# Altium PCB 6678_double_vpx.PcbDoc (part 3 of 3)
Units mil, origin at the board's own origin, x right, y up, seen from the top; angles counter-clockwise.
Board outline 6299.21 x 3937.01 mil, 6 copper layers (TOP, GND02, S03, S04, GND05, BOTTOM), stack 32.112 mil thick; 42 components, 156 nets, 734 pads, 1033 vias.
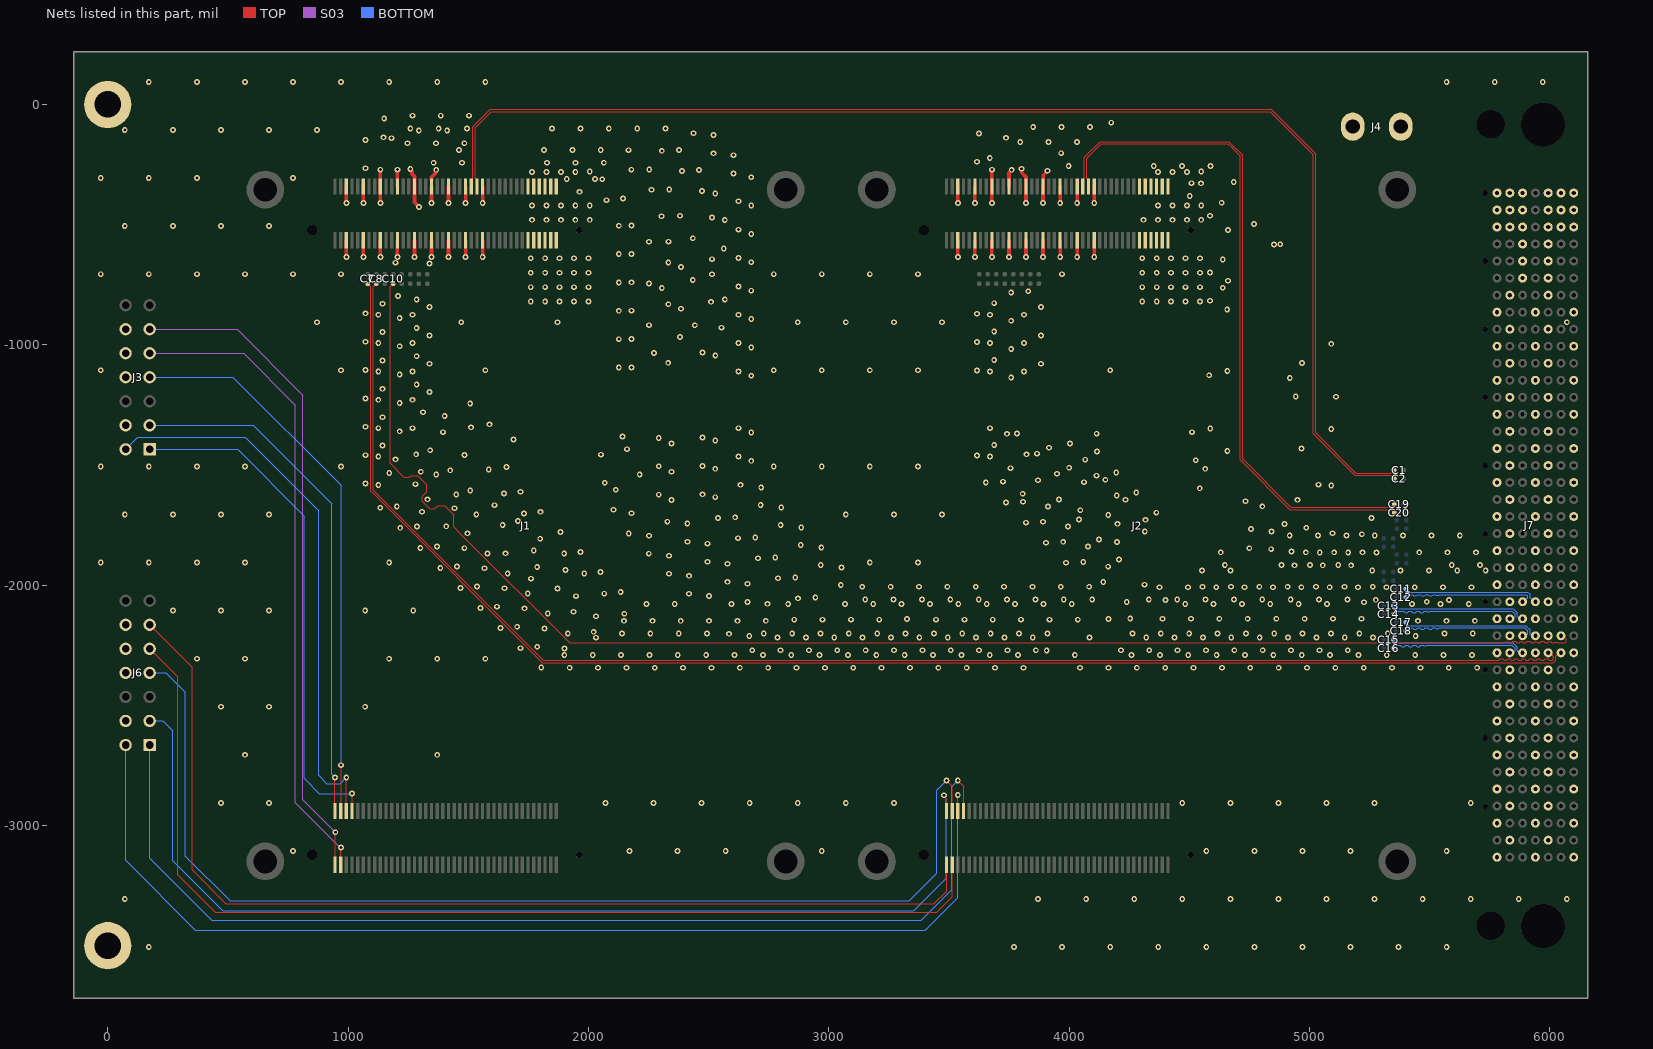
[diagram p7: the nets of this part, all layers, seen from the top]

## Via types
v1: diameter 24, hole 12, TOP to BOTTOM, tented both sides, 833 vias
v2: diameter 24, hole 12, TOP to BOTTOM, 200 vias

## Nets (pads, with @x,y where several pads share a name; then routed paths per layer and width w, separated by ;. In a path a pad name is that pad's centre, name@x,y a point inside that pad or via, vN(x,y) a via of type N, cw(c..) or ccw(c..) an arc to the next point about the centre after c; other vN are vias at no path point) (continued)
F4_BANK110_RX2_P: C10.1 J7.P2_B3 | length 6136.9
  TOP w4: C10.1@1187.91,-745.69 1175.19,-758.4 1175.19,-1493.05 1230.07,-1547.93 1233.56,-1551.41 1254.49,-1551.41 1260.83,-1545.07 1290.05,-1545.07 1327.3,-1582.32 1327.3,-1611.54 1308.42,-1630.42 1308.42,-1651.35 1339.81,-1682.75 1360.74,-1682.75 1373.28,-1670.21 1402.5,-1670.21 1439.75,-1707.46 1439.75,-1736.68 1439.75,-1757.61 1469.49,-1787.35 1922.14,-2240 5809,-2240 5811,-2240 5815.93,-2235.07 5825.93,-2235.07 5830.85,-2240 5840.85,-2240 5846.85,-2234 5856.85,-2234 5862.85,-2240 5872.85,-2240 5876.52,-2236.33 5886.52,-2236.33 5890.2,-2240 5900.2,-2240 5906.2,-2234 5916.2,-2234 5922.2,-2240 5932.2,-2240 5935.87,-2236.33 5945.87,-2236.33 5949.54,-2240 5959.54,-2240 5965.54,-2234 5975.54,-2234 5981.54,-2240 5991.54,-2240 5995.28,-2236.25 6005.28,-2236.25 6009.03,-2240 6019.03,-2240 6021.52,-2237.52 6031.52,-2237.52 6034,-2240 6036,-2240 6063.03,-2240 6068.03,-2235 6068.03,-2225 6053.66,-2210.63 J7.P2_B3@6046.46,-2210.63
F4_BANK110_RX3_N: C7.1 J7.P2_B4 | length 6142.3
  TOP w4: C7.1@1081.61,-745.69 1094.32,-758.4 1094.32,-1608.32 1100.18,-1614.18 1802.21,-2316.21 1808.07,-2322.07 6014.61,-2322.07 6024.88,-2311.8 6024.88,-2295 6038.39,-2281.5 J7.P2_B4@6046.46,-2281.5
F4_BANK110_RX3_P: C8.1 J7.P2_C4 | length 6142.1
  TOP w4: C8.1@1117.04,-745.69 1104.32,-758.4 1104.32,-1604.18 1812.21,-2312.07 5783,-2312.07 5787.54,-2312.07 5793.54,-2306.07 5803.54,-2306.07 5809.54,-2312.07 5819.54,-2312.07 5824.41,-2307.2 5834.41,-2307.2 5839.29,-2312.07 5849.29,-2312.07 5855.29,-2306.07 5865.29,-2306.07 5871.29,-2312.07 5881.29,-2312.07 5886.16,-2307.2 5896.16,-2307.2 5901.04,-2312.07 5911.04,-2312.07 5917.04,-2306.07 5927.04,-2306.07 5933.04,-2312.07 5943.04,-2312.07 5949.04,-2306.07 5959.04,-2306.07 5965.04,-2312.07 5975.04,-2312.07 5981.02,-2306.09 5991.02,-2306.09 5997,-2312.07 5999,-2312.07 6010.47,-2312.07 6014.88,-2307.66 6014.88,-2295 6001.38,-2281.5 J7.P2_C4@5993.31,-2281.5
F4_BANK110_TX0_N: C12.1 J7.P2_E1 | length 572.1
  BOTTOM w4: C12.1@5400.68,-2051 5412.76,-2038.92 5427,-2038.92 5429,-2038.92 5435,-2044.92 5445,-2044.92 5451,-2038.92 5461,-2038.92 5467,-2044.92 5477,-2044.92 5483,-2038.92 5493,-2038.92 5499,-2044.92 5509,-2044.92 5515,-2038.92 5525,-2038.92 5527.64,-2041.56 5537.64,-2041.56 5540.27,-2038.92 5555,-2038.92 5802,-2038.92 5895,-2038.92 5904.92,-2038.92 5908.58,-2042.58 5908.58,-2052.23 5896.05,-2064.77 5896.05,-2068.9 J7.P2_E1@5887.01,-2068.9
F4_BANK110_TX0_P: C11.1 J7.P2_D1 | length 572.1
  BOTTOM w4: C11.1@5400.68,-2015.57 5414.04,-2028.92 5909.06,-2028.92 5918.58,-2038.44 5918.58,-2052.23 5931.12,-2064.77 5931.12,-2068.9 J7.P2_D1@5940.16,-2068.9
F4_BANK110_TX1_N: C14.1 J7.P2_F2 | length 570.2
  BOTTOM w4: C14.1@5348.69,-2120.98 5361.4,-2108.27 5369.85,-2108.27 5370.12,-2108 5390,-2108 5392,-2108 5398,-2114 5408,-2114 5414,-2108 5424,-2108 5430,-2114 5440,-2114 5446,-2108 5456,-2108 5462,-2114 5472,-2114 5478,-2108 5488,-2108 5490,-2110 5500,-2110 5502,-2108 5527,-2108 5706,-2108 5844,-2108 5848,-2112 5855.43,-2119.43 5855.43,-2131 5853.06,-2133.37 5840.25,-2133.37 J7.P2_F2@5833.86,-2139.76
F4_BANK110_TX1_P: C13.1 J7.P2_E2 | length 570.2
  BOTTOM w4: C13.1@5348.69,-2085.55 5361.4,-2098.27 5365.71,-2098.27 5365.98,-2098 5848.14,-2098 5865.43,-2115.29 5865.43,-2131 5867.81,-2133.37 5880.62,-2133.37 J7.P2_E2@5887.01,-2139.76
F4_BANK110_TX2_N: C18.1 J7.P2_E3 | length 572.1
  BOTTOM w4: C18.1@5400.68,-2190 5412.69,-2178 5426,-2178 5428,-2178 5434,-2184 5444,-2184 5450,-2178 5460,-2178 5466,-2184 5476,-2184 5482,-2178 5492,-2178 5498,-2184 5508,-2184 5514,-2178 5524,-2178 5526.72,-2180.72 5536.72,-2180.72 5539.43,-2178 5544,-2178 5782,-2178 5890,-2178 5896.58,-2178 5908.58,-2190 5908.58,-2201.89 5906.24,-2204.24 5893.4,-2204.24 J7.P2_E3@5887.01,-2210.63
F4_BANK110_TX2_P: C17.1 J7.P2_D3 | length 572.1
  BOTTOM w4: C17.1@5400.68,-2154.57 5414.12,-2168 5900.73,-2168 5918.58,-2185.86 5918.58,-2201.89 5920.93,-2204.24 5933.77,-2204.24 J7.P2_D3@5940.16,-2210.63
F4_BANK110_TX3_N: C16.1 J7.P2_F4 | length 569.8
  BOTTOM w4: C16.1@5348.68,-2262 5361.4,-2249.28 5376,-2249.28 5378,-2249.28 5384,-2255.28 5394,-2255.28 5400,-2249.28 5410,-2249.28 5416,-2255.28 5426,-2255.28 5432,-2249.28 5442,-2249.28 5448,-2255.28 5458,-2255.28 5464,-2249.28 5474,-2249.28 5476,-2251.28 5486,-2251.28 5488,-2249.28 5519,-2249.28 5736,-2249.28 5833,-2249.28 5842.72,-2249.28 5855.43,-2262 5855.43,-2272.76 5853.09,-2275.1 5840.25,-2275.1 J7.P2_F4@5833.86,-2281.5
F4_BANK110_TX3_P: C15.1 J7.P2_E4 | length 569.8
  BOTTOM w4: C15.1@5348.68,-2226.57 5361.4,-2239.28 5846.86,-2239.28 5865.43,-2257.86 5865.43,-2272.76 5867.78,-2275.1 5880.62,-2275.1 J7.P2_E4@5887.01,-2281.5
GND: J1.A1_3 J1.A1_6 J1.A1_9 J1.A1_12 J1.A1_15 J1.A1_18 J1.A1_21 J1.A1_24 J1.A1_27 J1.A1_35 J1.A1_36 J1.A1_37 J1.A1_38 J1.A1_39 J1.A1_40 J1.B1_3 J1.B1_6 J1.B1_9 J1.B1_12 J1.B1_15 J1.B1_18 J1.B1_21 J1.B1_24 J1.B1_27 J2.A1_3 J2.A1_6 J2.A1_9 J2.A1_12 J2.A1_15 J2.A1_18 J2.A1_21 J2.A1_24 J2.A1_27 J2.A1_35 J2.A1_36 J2.A1_37 J2.A1_38 J2.A1_39 J2.A1_40 J2.B1_3 J2.B1_6 J2.B1_9 J2.B1_12 J2.B1_15 J2.B1_18 J2.B1_21 J2.B1_24 J2.B1_27 J3.4 J3.8 J3.10 J3.12 J4.2 J6.4 J6.8 J6.10 J6.12 J7.P0_A8 J7.P0_C4 J7.P0_C5 J7.P0_C6 J7.P0_C7 J7.P0_D8 J7.P0_E4 J7.P0_E5 J7.P0_E6 J7.P0_F7 J7.P0_G8 J7.P1_A2 J7.P1_A4 J7.P1_A6 J7.P1_A8 J7.P1_A10 J7.P1_A12 J7.P1_A14 J7.P1_A16 J7.P1_C1 J7.P1_C3 J7.P1_C5 J7.P1_C7 J7.P1_C9 J7.P1_C11 J7.P1_C13 J7.P1_C15 J7.P1_D2 J7.P1_D4 J7.P1_D6 J7.P1_D8 J7.P1_D10 J7.P1_D12 J7.P1_D14 J7.P1_D16 J7.P1_F1 J7.P1_F3 J7.P1_F5 J7.P1_F7 J7.P1_F9 J7.P1_F11 J7.P1_F13 J7.P1_F15 J7.P1_G2 J7.P1_G4 J7.P1_G6 J7.P1_G8 J7.P1_G10 J7.P1_G12 J7.P1_G14 J7.P1_G16 J7.P2_A2 J7.P2_A4 J7.P2_A6 J7.P2_A8 J7.P2_A10 J7.P2_A12 J7.P2_A14 J7.P2_A16 J7.P2_C1 J7.P2_C3 J7.P2_C5 J7.P2_C7 J7.P2_C9 J7.P2_C11 J7.P2_C13 J7.P2_C15 J7.P2_D2 J7.P2_D4 J7.P2_D6 J7.P2_D8 J7.P2_D10 J7.P2_D12 J7.P2_D14 J7.P2_D16 J7.P2_F1 J7.P2_F3 J7.P2_F5 J7.P2_F7 J7.P2_F9 J7.P2_F11 J7.P2_F13 J7.P2_F15 J7.P2_G2 J7.P2_G4 J7.P2_G6 J7.P2_G8 J7.P2_G10 J7.P2_G12 J7.P2_G14 J7.P2_G16 pad.0 | length 2843.4
  TOP w15: v2@992.72,-631.35 J1.A1_3@992.72,-565 ; v2@992.72,-406.94 J1.B1_3@992.72,-340.59 ; v2@1063.58,-631.35 J1.A1_6@1063.58,-565 ; v2@1063.58,-406.94 J1.B1_6@1063.58,-340.59 ; v2@1134.45,-631.35 J1.A1_9@1134.45,-565 ; v2@1134.45,-406.94 J1.B1_9@1134.45,-340.59 v2@1134.45,-274.24 ; v2@1205.31,-631.35 J1.A1_12@1205.31,-565 ; J1.B1_12@1205.31,-340.59 v2@1205.31,-274.24 ; v2(1259,-269) 1259,-271.44 1266,-278.44 1266,-289 1276.18,-299.18 1276.18,-407.37 1295,-426.19 v2(1295,-427) ; v2@1276.18,-631.35 J1.A1_15@1276.18,-565 ; v2@1347.05,-631.35 J1.A1_18@1347.05,-565 ; v2@1347.05,-406.94 J1.B1_18@1347.05,-340.59 ; J1.B1_18@1347.05,-314.63 1347.05,-302.95 1365.28,-284.72 1365.28,-273.72 v2(1367,-272) ; v2@1417.91,-631.35 J1.A1_21@1417.91,-565 ; v2@1417.91,-406.94 J1.B1_21@1417.91,-340.59 ; v2@1488.78,-631.35 J1.A1_24@1488.78,-565 ; v2@1488.78,-406.94 J1.B1_24@1488.78,-340.59 ; v2@1559.65,-631.35 J1.A1_27@1559.65,-565 ; v2@1559.65,-406.94 J1.B1_27@1559.65,-340.59 ; v2@3535,-410 3535,-409.19 3537.24,-406.94 J2.B1_3@3537.24,-340.59 ; v2@3537.24,-631.35 J2.A1_3@3537.24,-565 ; v2@3608.11,-631.35 J2.A1_6@3608.11,-565 ; v2@3608.11,-406.94 J2.B1_6@3608.11,-340.59 ; v2@3678.98,-631.35 J2.A1_9@3678.98,-565 ; v2@3678.98,-406.94 J2.B1_9@3678.98,-340.59 v2@3678.98,-274.24 ; v2@3749.84,-631.35 J2.A1_12@3749.84,-565 ; J2.B1_12@3749.84,-340.59 3749.84,-283.97 3761,-272.81 v2(3761,-272) ; v2(3801.45,-267.4) 3803.17,-269.12 3803.17,-284.17 3820.71,-301.71 v2@3820.71,-406.94 ; v2@3820.71,-631.35 J2.A1_15@3820.71,-565 ; v2@3891.57,-631.35 J2.A1_18@3891.57,-565 ; v2@3891.57,-406.94 3891.57,-349 J2.B1_18@3891.57,-340.59 3892.19,-339.98 3892.19,-294.76 3910.32,-276.62 v2(3910.32,-275.81) ; v2@3962.44,-631.35 J2.A1_21@3962.44,-565 ; v2@3962.44,-406.94 J2.B1_21@3962.44,-340.59 ; v2@4033.31,-631.35 J2.A1_24@4033.31,-565 ; v2@4033.31,-406.94 J2.B1_24@4033.31,-340.59 ; v2@4104.17,-631.35 J2.A1_27@4104.17,-565 ; v2@4104.17,-406.94 J2.B1_27@4104.17,-340.59
  other v1: 171,-3506 3771,-3506 3971,-3506 4171,-3506 4371,-3506 4571,-3506 4771,-3506 4971,-3506 5171,-3506 5371,-3506 5571,-3506 71,-3306 3871,-3306 4071,-3306 4271,-3306 4471,-3306 4671,-3306 4871,-3306 5071,-3306 5271,-3306 5471,-3306 5671,-3306 5871,-3306 6071,-3306 771,-3106 2171,-3106 2371,-3106 2571,-3106 2971,-3106 4571,-3106 4771,-3106 4971,-3106 5171,-3106 5571,-3106 471,-2906 671,-2906 2071,-2906 2271,-2906 2471,-2906 2671,-2906 2871,-2906 3071,-2906 3271,-2906 4471,-2906 4671,-2906 4871,-2906 5071,-2906 5271,-2906 5671,-2906 571,-2706 1371,-2706 471,-2506 671,-2506 1071,-2506 1921.88,-2343.61 2039.88,-2343.61 2157.88,-2343.61 2275.88,-2343.61 2393.88,-2343.61 2511.88,-2343.61 2629.88,-2343.61 2747.88,-2343.61 2865.88,-2343.61 2983.88,-2343.61 3101.88,-2343.61 3219.88,-2343.61 3337.88,-2343.61 3455.88,-2343.61 3573.88,-2343.61 3691.88,-2343.61 3809.88,-2343.61 4045.88,-2343.61 4163.88,-2343.61 4281.88,-2343.61 4399.88,-2343.61 4517.88,-2343.61 4635.88,-2343.61 4753.88,-2343.61 4871.88,-2343.61 4989.88,-2343.61 5107.88,-2343.61 5225.88,-2343.61 5343.88,-2343.61 5461.88,-2343.61 5579.88,-2343.61 5697.88,-2343.61 1803.88,-2342.77 371,-2306 571,-2306 1171,-2306 1371,-2306 1571,-2306 1899.87,-2290.53 2017.87,-2290.53 2135.87,-2290.53 2253.87,-2290.53 2371.87,-2290.53 2489.87,-2290.53 2607.87,-2290.53 2725.87,-2290.53 2843.87,-2290.53 2961.87,-2290.53 3079.87,-2290.53 3197.87,-2290.53 3315.87,-2290.53 3433.87,-2290.53 3551.87,-2290.53 3669.87,-2290.53 3787.87,-2290.53 4023.87,-2290.53 4259.87,-2290.53 4377.87,-2290.53 4495.87,-2290.53 4613.87,-2290.53 4731.87,-2290.53 4849.87,-2290.53 4967.87,-2290.53 5085.87,-2290.53 5203.87,-2290.53 5321.87,-2290.53 5439.87,-2290.53 5557.87,-2290.53 5675.87,-2290.53 3906.55,-2271.54 2681.48,-2270.82 2799.48,-2270.82 2917.48,-2270.82 3035.48,-2270.82 3153.48,-2270.82 3271.48,-2270.82 3389.48,-2270.82 3507.48,-2270.82 3625.48,-2270.82 3743.48,-2270.82 3861.48,-2270.82 4215.48,-2270.82 4333.48,-2270.82 4451.48,-2270.82 4569.48,-2270.82 4687.48,-2270.82 4805.48,-2270.82 4923.48,-2270.82 5041.48,-2270.82 5159.48,-2270.82 1900.84,-2263.3 1717.71,-2262.16 1786.94,-2256.34 2031.03,-2218.46 2786.87,-2217.75 2904.87,-2217.75 3022.87,-2217.75 3140.87,-2217.75 3258.87,-2217.75 3376.87,-2217.75 3494.87,-2217.75 3612.87,-2217.75 3730.87,-2217.75 3848.87,-2217.75 4084.87,-2217.75 4320.87,-2217.75 4438.87,-2217.75 4556.87,-2217.75 4674.87,-2217.75 4792.87,-2217.75 4910.87,-2217.75 5028.87,-2217.75 5146.87,-2217.75 5264.87,-2217.75 2669.04,-2211.44 5442,-2212 2585.18,-2202.63 1914.24,-2201.64 2139.61,-2201.54 2257.61,-2201.54 2375.61,-2201.54 2493.61,-2201.54 2729.61,-2201.54 2847.61,-2201.54 2965.61,-2201.54 3083.61,-2201.54 3201.61,-2201.54 3319.61,-2201.54 3437.61,-2201.54 3555.61,-2201.54 3673.61,-2201.54 3791.61,-2201.54 3909.61,-2201.54 4263.61,-2201.54 4381.61,-2201.54 4499.61,-2201.54 4617.61,-2201.54 4735.61,-2201.54 4853.61,-2201.54 4971.61,-2201.54 5089.61,-2201.54 5207.61,-2201.54 5325.61,-2201.54 5561.61,-2201.54 5679.61,-2201.54 2021.83,-2194.29 1817.4,-2179.86 1634.27,-2178.73 1703.5,-2172.9 2148.24,-2148.46 2266.24,-2148.46 2384.24,-2148.46 2502.24,-2148.46 2620.24,-2148.46 2738.24,-2148.46 5452.24,-2148.46 5570.24,-2148.46 5688.24,-2148.46 2856.24,-2143.46 2974.24,-2143.46 3092.24,-2143.46 3210.24,-2143.46 3446.24,-2143.46 3564.24,-2143.46 3682.24,-2143.46 3800.24,-2143.46 3918.24,-2143.46 4036.24,-2143.46 3325,-2141 4164,-2141 4389,-2140 4507,-2140 4625,-2140 4743,-2140 4862.24,-2140 4980.24,-2140 5098.24,-2140 5216.24,-2140 4254,-2139 2031.82,-2129.22 1830.8,-2118.2 2149.33,-2118.78 1938.39,-2110.85 271,-2106 471,-2106 671,-2106 1071,-2106 1271,-2106 1733.96,-2096.42 1550.83,-2095.29 1620.06,-2089.46 2241.15,-2078.46 2359.15,-2078.46 2595.15,-2078.46 2831.15,-2078.46 3067.15,-2078.46 3185.15,-2078.46 3303.15,-2078.46 3421.15,-2078.46 3539.15,-2078.46 3657.15,-2078.46 3775.15,-2078.46 3893.15,-2078.46 4011.15,-2078.46 4483.15,-2078.46 4601.15,-2078.46 4719.15,-2078.46 4837.15,-2078.46 4955.15,-2078.46 5073.15,-2078.46 5427.15,-2078.46 5545.15,-2078.46 5663.15,-2078.46 2745.28,-2077.68 5227,-2071 2662.1,-2069.56 4240,-2070 5488,-2069 4400.86,-2061.54 5275.84,-2061.19 5580.86,-2061.54 3151.85,-2059.82 3269.85,-2059.82 3387.85,-2059.82 3505.85,-2059.82 3623.85,-2059.82 3741.85,-2059.82 3859.85,-2059.82 3977.85,-2059.82 4095.85,-2059.82 4331.85,-2059.82 4449.85,-2059.82 4567.85,-2059.82 4685.85,-2059.82 4803.85,-2059.82 4921.85,-2059.82 5039.85,-2059.82 5157.85,-2059.82 2872.37,-2054.83 2944.24,-2051.64 1948.39,-2045.79 2502.16,-2044.56 2065.89,-2035.35 2418.3,-2035.76 1747.36,-2034.76 2134.2,-2028.6 1871.51,-2013.64 1650.53,-2012.98 1467.39,-2011.85 4376.19,-2008.46 4494.19,-2008.46 4612.19,-2008.46 4730.19,-2008.46 4848.19,-2008.46 4966.19,-2008.46 5084.19,-2008.46 5202.19,-2008.46 5320.19,-2008.46 5438.19,-2008.46 5556.19,-2008.46 5674.19,-2008.46 3139.48,-2006.75 3257.48,-2006.75 3375.48,-2006.75 3493.48,-2006.75 3611.48,-2006.75 3729.48,-2006.75 3847.48,-2006.75 3965.48,-2006.75 4083.48,-2006.75 4555.48,-2006.75 4673.48,-2006.75 4791.48,-2006.75 4909.48,-2006.75 5027.48,-2006.75 5145.48,-2006.75 5263.48,-2006.75 1536.62,-2006.02 3050.29,-1999.74 4314,-1998 2661.84,-1994.24 4142.23,-1986.63 2578.66,-1986.12 1760.7,-1973.07 2788.93,-1971.39 2860.8,-1968.2 2418.73,-1961.13 2334.86,-1952.32 1663.92,-1951.32 1982.45,-1951.91 2050.77,-1945.17 4553.19,-1938.46 4671.19,-1938.46 5261.19,-1938.46 5379.19,-1938.46 5497.19,-1938.46 5615.19,-1938.46 5733.19,-1938.46 1904.12,-1936.4 1567.09,-1929.55 1383.95,-1928.41 3052.55,-1926.95 1786.76,-1924.08 1453.18,-1922.58 4162.47,-1923.07 4937.63,-1917.54 5055.63,-1917.54 5173.63,-1917.54 2966.85,-1916.3 4647.94,-1916.54 4883.94,-1916.54 5001.94,-1916.54 5119.94,-1916.54 5591.94,-1916.54 5709.94,-1916.54 2578.4,-1910.8 3987.37,-1906.83 -29,-1906 171,-1906 371,-1906 571,-1906 1171,-1906 3171,-1906 3371,-1906 4058.79,-1903.19 2495.22,-1902.68 4208.05,-1893.59 2705.49,-1887.95 2777.36,-1884.76 2335.29,-1877.69 1899.01,-1868.47 2251.42,-1868.88 1580.48,-1867.88 1655.16,-1867.54 5043.02,-1864.46 5161.02,-1864.46 5279.02,-1864.46 4630.95,-1863.46 4984.95,-1863.46 5102.95,-1863.46 5220.95,-1863.46 5456.95,-1863.46 5574.95,-1863.46 5692.95,-1863.46 1967.33,-1861.73 4925.12,-1859.66 1772.56,-1855.67 4840.67,-1850.27 4749.88,-1846.54 1483.65,-1846.11 1300.51,-1844.97 2969.11,-1843.51 1369.74,-1839.14 4079.03,-1839.63 2883.41,-1832.87 2494.96,-1827.36 3903.93,-1823.39 4199.36,-1820.51 2411.78,-1819.24 3975.35,-1819.75 4124.61,-1810.15 1799.19,-1806.74 2622.05,-1804.51 2693.92,-1801.32 2251.85,-1794.25 4917.83,-1793.46 5035.83,-1793.46 5153.83,-1793.46 5271.83,-1793.46 5389.83,-1793.46 5507.83,-1793.46 5625.83,-1793.46 5218,-1788 2167.98,-1785.44 1497.05,-1784.45 5096,-1784 1883.89,-1778.29 4315.15,-1776.54 4841.68,-1776.22 4757.24,-1766.84 1217.08,-1761.53 4986.72,-1761.26 2885.67,-1760.07 3995.59,-1756.19 1286.3,-1755.7 1408.21,-1755.37 1643.08,-1750.16 2799.97,-1749.43 4895.98,-1745.58 4201.46,-1744.93 2411.52,-1743.92 3820.49,-1739.95 3891.91,-1736.31 2328.34,-1735.8 1706.84,-1733.27 4317.72,-1728.18 4041.17,-1726.72 2538.61,-1721.07 5258.58,-1720.75 2610.48,-1717.88 4163.12,-1708.22 71,-1706 271,-1706 471,-1706 671,-1706 1533.62,-1706.08 3071,-1706 3271,-1706 3471,-1706 1732.13,-1701.59 2179.54,-1701 4362.97,-1698.37 1307.07,-1694.6 1800.45,-1694.85 4046.8,-1688.35 2104.16,-1686.19 1442.54,-1679.79 1133.64,-1678.09 2802.23,-1676.63 1202.87,-1672.27 3912.15,-1672.75 4804,-1672 1609.1,-1667.17 2716.53,-1665.99 3737.06,-1656.51 3808.48,-1652.88 4734.46,-1651.05 2345.54,-1646.1 4234.29,-1644.74 4950,-1645 3957.74,-1643.28 1330.44,-1642.92 2527.54,-1633.95 4198.05,-1626.98 2292.46,-1623.39 1450.18,-1622.64 2474.46,-1622.03 3806.73,-1619.75 1648.69,-1618.15 4279.53,-1614.93 1717.01,-1611.41 1508.35,-1605.75 2113.69,-1603.08 4543.8,-1597.2 2718.8,-1593.2 5090.54,-1585.86 1125.86,-1582.86 2633.09,-1582.55 5037.46,-1581.93 1280.09,-1579.72 1072.79,-1577 2067.77,-1573.94 3653.62,-1573.08 4062.37,-1571.38 3725.04,-1569.44 3870.72,-1563.57 4150.85,-1561.31 4113.72,-1544.45 1366.74,-1539.2 2213.29,-1539.79 3949.7,-1536.3 1171.38,-1533.84 4196.09,-1531.49 1302.82,-1528.2 2345.54,-1528.1 1424.91,-1522.31 1585.15,-1518.72 2527.54,-1515.95 4566.37,-1515.99 3756.07,-1513.18 4000.36,-1511.7 1659.25,-1508.52 -29,-1506 171,-1506 371,-1506 571,-1506 971,-1506 2292.46,-1505.39 2771,-1506 2971,-1506 3171,-1506 3371,-1506 2474.46,-1504.03 2677.54,-1482.64 4526.89,-1480.42 4067.43,-1477.84 1196.73,-1476.54 1125.86,-1464.86 2624.46,-1464.87 3670.39,-1464.86 3617.31,-1460.8 1072.79,-1459 1483.93,-1458.08 2051.82,-1457.03 1283.31,-1455.76 3822.89,-1455.7 3866.26,-1452.86 4116.56,-1444.32 4658.29,-1441.99 1341.47,-1438.87 2160.62,-1434.19 4966.73,-1431.78 3916.82,-1428.36 1143.65,-1419.14 3688.18,-1416.66 4003.93,-1410.7 2345.54,-1410.1 2527.54,-1397.95 1688.18,-1394.12 2292.46,-1387.39 2474.46,-1386.03 2142.17,-1381.12 3741.25,-1370.5 3782.83,-1369.43 4114.57,-1369.67 2677.54,-1364.64 1395.44,-1363.47 4511.3,-1363.45 1214.52,-1359.89 5090.54,-1349.86 4587.2,-1347.81 1125.86,-1346.86 1267.59,-1346.86 2624.46,-1346.87 3670.39,-1346.86 1511.72,-1343.4 1072.79,-1341 1588.59,-1330.82 1143.65,-1301.14 1401.84,-1296.24 1311.29,-1280.75 1507.97,-1244.66 1214.52,-1241.89 1125.86,-1228.86 1267.59,-1228.86 1072.79,-1223 5110,-1216 4943,-1215 1338.46,-1196.7 1143.65,-1183.14 1285.38,-1165.63 4918.46,-1138.24 3759.05,-1135.85 2677.54,-1128.64 4582.86,-1126.73 1214.52,-1123.89 1125.86,-1110.86 1267.59,-1110.86 2624.46,-1110.87 3670.39,-1110.86 3812.12,-1110.86 4658.29,-1109.13 3617.31,-1106.8 -29,-1106 971,-1106 1571,-1106 2771,-1106 2971,-1106 3171,-1106 3371,-1106 4171,-1106 1072.79,-1105 2126.46,-1094.55 2179.54,-1093.94 1338.46,-1078.7 3882.99,-1078.7 4969,-1076 2331.74,-1074.88 1143.65,-1065.14 3688.18,-1062.66 1285.38,-1047.63 2528.03,-1043.96 2273.24,-1034.3 2474.46,-1032.03 3759.05,-1017.85 2677.54,-1010.64 1214.52,-1005.89 5090.54,-995.86 1125.86,-992.86 1267.59,-992.86 2624.46,-992.87 3670.39,-992.86 3812.12,-992.86 3617.31,-988.8 1072.79,-987 2126.46,-976.55 2179.54,-975.94 2381.22,-967.75 1338.46,-960.7 3882.99,-960.7 1143.65,-947.14 3688.18,-944.66 1285.38,-929.63 2553.2,-928.67 2252.46,-918.14 2442.74,-918.38 871,-906 1471,-906 1871,-906 2871,-906 3071,-906 3271,-906 3471,-906 6071,-906 3759.05,-899.85 2677.54,-892.64 1214.52,-887.89 1125.86,-874.86 1267.59,-874.86 2624.46,-874.87 3670.39,-874.86 3812.12,-874.86 3617.31,-870.8 1072.79,-869 2126.46,-858.55 2179.54,-857.94 4657.61,-853.51 2385.54,-849.83 1338.46,-842.7 3882.99,-842.7 2332.46,-831.4 1143.65,-829.14 3688.18,-826.66 2509.67,-821.19 4586.46,-816.87 1285.38,-811.63 2567.54,-811.55 1208,-797 3759.05,-781.85 3829.91,-776.93 2677.54,-774.64 2305.54,-763.09 4639.54,-762.72 2624.46,-756.87 2252.46,-744.66 2126.46,-740.55 2179.54,-739.94 4660.73,-733.47 2434.46,-730.26 2514.24,-706.27 -29,-706 171,-706 371,-706 571,-706 771,-706 971,-706 2771,-706 2971,-706 3171,-706 3371,-706 3971,-706 4586.46,-698.87 2385.54,-676.35 1338.46,-661.73 1196.73,-658.26 2332.46,-657.92 2677.54,-656.64 4639.54,-644.72 2514.46,-643.52 2624.46,-638.87 2126.46,-622.55 2179.54,-621.94 2563,-598.81 4852.3,-582.03 4878.46,-581.44 2252.46,-571.18 2332.63,-570.88 2434.46,-556.78 2677.54,-538.64 4661.35,-522.48 2624.46,-520.87 71,-506 271,-506 471,-506 671,-506 2126.46,-504.55 2179.54,-503.94 4769.87,-497.6 2567.54,-480.9 2514.46,-470.04 2303.78,-464.92 2380.84,-463.18 4586.46,-462.87 2677.54,-420.64 4634.7,-408.82 2624.46,-402.87 2075.51,-398.11 2143.91,-391.45 4501.93,-380.54 2527.54,-369.89 1962.69,-363.54 2472.25,-359.85 2261.98,-354.58 2336.34,-353.89 4548.58,-328.15 4508.78,-327.46 4685.18,-322.64 2057.44,-311.15 1909.74,-310.46 2027.74,-310.46 -29,-306 171,-306 371,-306 771,-306 2677.54,-302.64 2604.05,-286.65 2388.81,-276.41 2460.34,-272.89 2178.54,-271.14 2252.91,-270.45 1072.48,-265.34 3998.12,-255.54 4352.12,-255.54 4470.12,-255.54 4588.12,-255.54 1356.06,-242.54 1474.06,-242.54 1828.06,-242.54 1946.06,-242.54 2064.06,-242.54 3617.01,-238.21 3670.08,-223.12 2603.34,-210.89 2520.61,-203.21 3967,-202.46 2305.37,-192.97 2166.44,-190.15 1461.45,-189.46 1815.45,-189.46 1933.45,-189.46 2051.45,-189.46 2376.91,-189.45 1247.64,-161.54 1365.64,-161.54 1483.64,-161.54 3796.76,-156.54 3914.76,-156.54 4032.76,-156.54 1072.48,-147.34 1180.62,-140.25 3737.81,-138.73 1146.92,-136.68 2519.91,-127.45 3624.92,-120.48 2437.17,-119.77 1294.26,-108.46 1412.26,-108.46 71,-106 271,-106 471,-106 671,-106 871,-106 1258.92,-99.54 1376.92,-99.54 1494.92,-99.54 1848.92,-99.54 1966.92,-99.54 2084.92,-99.54 2202.92,-99.54 2320.92,-99.54 3850.42,-93.46 3968.42,-93.46 4086.42,-93.46 4175.14,-75.54 1150.09,-58.46 1267.48,-46.46 1385.48,-46.46 1503.48,-46.46 171,94 371,94 571,94 771,94 971,94 1171,94 1371,94 1571,94 5571,94 5771,94 5971,94
  other v2: 1760,-820 1820,-820 1880,-820 1940,-820 2000,-820 4304.53,-820 4364.53,-820 4424.53,-820 4484.53,-820 4544.53,-820 1760,-760 1820,-760 1880,-760 1940,-760 2000,-760 4304.53,-760 4364.53,-760 4424.53,-760 4484.53,-760 4544.53,-760 1760,-700 1820,-700 1880,-700 1940,-700 2000,-700 4304.53,-700 4364.53,-700 4424.53,-700 4484.53,-700 4544.53,-700 1760,-640 1820,-640 1880,-640 1940,-640 2000,-640 4304.53,-640 4364.53,-640 4424.53,-640 4484.53,-640 4544.53,-640 992.97,-634.41 1063.84,-634.41 1134.7,-634.41 1205.57,-634.41 1276.44,-634.41 1347.3,-634.41 1418.17,-634.41 1489.04,-634.41 1559.9,-634.41 3537.5,-634.41 3608.37,-634.41 3679.23,-634.41 3750.1,-634.41 3820.96,-634.41 3891.83,-634.41 3962.7,-634.41 4033.56,-634.41 4104.43,-634.41 992.97,-410 1063.84,-410 1134.7,-410 1347.3,-410 1418.17,-410 1489.04,-410 1559.9,-410 3537.5,-410 3608.37,-410 3679.23,-410 3820.96,-410 3891.83,-410 3962.7,-410 4033.56,-410 4104.43,-410 1134.19,-271.18 1205.06,-271.18 3678.72,-271.18
HEAD2_TCK: J2.A2_1 J6.11 | length 4422.1
  TOP w4.5: J6.11@174.4,-2164.96 351,-2341.56 351,-3185 492,-3326 3437,-3326 3490,-3273 J2.A2_1@3490,-3163.43
HEAD2_TCK2: J2.A2_2 J6.9 | length 4436
  TOP w4.5: J6.9@174.4,-2264.96 291,-2381.56 291,-3205.21 446.79,-3361 3450,-3361 3513.62,-3297.38 J2.A2_2@3513.62,-3163.43
HEAD2_TDI: J2.B2_1 J6.3 | length 4435
  TOP w4.5: v2(3479,-2874) 3479,-2879 3489.76,-2889.76 3489.76,-2938.77 J2.B2_1@3490,-2939.02
  BOTTOM w4.5: J6.3@174.4,-2564.96 228.96,-2564.96 270,-2606 270,-3147 478,-3355 3354,-3355 3489.76,-3219.24 3489.76,-2889.76 3479,-2879 v2(3479,-2874)
HEAD2_TDO: J2.B2_2 J6.7 | length 4653.6
  TOP w4.5: v2(3489.76,-2813) 3513.62,-2836.87 J2.B2_2@3513.62,-2939.02
  BOTTOM w4.5: J6.7@174.4,-2364.96 241.96,-2364.96 323,-2446 323,-3127 510,-3314 3335,-3314 3450,-3199 3450,-2852.76 v2(3489.76,-2813)
HEAD2_TMS: J2.B2_4 J6.1 | length 4568
  TOP w4.5: v2(3537,-2813) 3560.87,-2836.87 J2.B2_4@3560.87,-2939.02
  BOTTOM w4.5: J6.1@174.4,-2664.96 174.4,-3136.4 432,-3394 3384,-3394 3511,-3267 3511,-2839 v2(3537,-2813)
HEAD2_TRST#_B: J2.B2_3 J6.2 | length 4612
  TOP w4.5: v2(3537,-2873) 3537,-2938.77 J2.B2_3@3537.24,-2939.02
  BOTTOM w4.5: J6.2@74.4,-2664.96 74.4,-3145.4 364,-3435 3402,-3435 3537,-3300 v2(3537,-2873)
HEAD_TCK: J1.A2_1 J3.11 | length 2762.1
  TOP w4.5: J1.A2_1@945.47,-3163.43 947,-3161.9 v2(947,-3028)
  S03 w4.5: J3.11@174.4,-935.04 538.04,-935.04 812,-1209 812,-2893 v2(947,-3028)
HEAD_TCK2: J1.A2_2 J3.9 | length 2688.9
  TOP w4.5: J1.A2_2@969.09,-3163.43 970,-3162.52 v2(970,-3092)
  S03 w4.5: J3.9@174.4,-1035.04 565.04,-1035.04 781,-1251 781,-2906 967,-3092 v2(970,-3092)
HEAD_TDI: J1.B2_1 J3.3 | length 2176.4
  TOP w4.5: J1.B2_1@945.17,-2939.31 v2(945.17,-2800.34)
  BOTTOM w4.5: J3.3@174.4,-1335.04 606.04,-1335.04 932,-1661 932,-2787.17 v2(945.17,-2800.34)
HEAD_TDO: J1.B2_2 J3.7 | length 2337.8
  TOP w4.5: J1.B2_2@969.09,-2939.02 971,-2937.11 v2(971,-2749)
  BOTTOM w4.5: J3.7@174.4,-1135.04 521.04,-1135.04 971,-1585 v2(971,-2749)
HEAD_TMS: J1.B2_4 J3.1 | length 2146.2
  TOP w4.5: J1.B2_4@1016.68,-2938.68 v2(1016.68,-2867)
  BOTTOM w4.5: J3.1@174.4,-1435.04 540.04,-1435.04 818,-1713 818,-2804 881,-2867 v2(1016.68,-2867)
HEAD_TRST#_B: J1.B2_3 J3.2 | length 2331.1
  TOP w4.5: J1.B2_3@992.76,-2938.98 v2(992.76,-2800)
  BOTTOM w4.5: J3.2@74.4,-1435.04 124.94,-1384.5 571.5,-1384.5 877,-1690 877,-2791 912,-2826 966.76,-2826 v2(992.76,-2800)
OUT1CLK_N: C1.2 J1.B1_25 | length 5425.7
  TOP w4: J1.B1_25@1512.4,-340.59 1512.4,-314.02 1519.21,-307.2 1519.21,-92.79 1525.07,-86.93 1586.14,-25.86 1592,-20 4841.14,-20 5026,-204.86 5026,-1366.57 5193.14,-1533.72 5338.6,-1533.72 C1.2@5351.31,-1521
OUT1CLK_P: C2.2 J1.B1_26 | length 5409.1
  TOP w4: J1.B1_26@1536.02,-340.59 1536.02,-314.02 1529.21,-307.2 1529.21,-96.93 1596.14,-30 4837,-30 4910,-103 5016,-209 5016,-1370.71 5189,-1543.72 5338.6,-1543.72 C2.2@5351.31,-1556.43
OUT2CLK_N: C19.2 J2.B1_25 | length 2816.2
  TOP w4: J2.B1_25@4056.93,-340.59 4056.93,-314.02 4063.74,-307.2 4063.74,-220.18 4129.85,-154.07 4665.21,-154.07 4722,-210.86 4722,-1474.86 4922.86,-1675.72 5340.6,-1675.72 C19.2@5353.32,-1663
OUT2CLK_P: C20.2 J2.B1_26 | length 2799.6
  TOP w4: J2.B1_26@4080.55,-340.59 4080.55,-314.02 4073.74,-307.2 4073.74,-224.32 4133.99,-164.07 4661.07,-164.07 4678,-181 4712,-215 4712,-1479 4918.72,-1685.72 5340.6,-1685.72 C20.2@5353.32,-1698.43
VCO_12V: J1.B1_35 J1.B1_36 J1.B1_37 J1.B1_38 J1.B1_39 J1.B1_40 J2.B1_35 J2.B1_36 J2.B1_37 J2.B1_38 J2.B1_39 J2.B1_40 J4.1 J7.P0_A1 J7.P0_A2 J7.P0_A3 J7.P0_B1 J7.P0_B2 J7.P0_B3 J7.P0_C1 J7.P0_C2 J7.P0_C3 J7.P0_E1 J7.P0_E2 J7.P0_E3 J7.P0_F1 J7.P0_F2 J7.P0_F3 J7.P0_G1 J7.P0_G2 J7.P0_G3
  other v2: 1765.47,-480 1825.47,-480 1885.47,-480 1945.47,-480 2005.47,-480 4310,-480 4370,-480 4430,-480 4490,-480 4550,-480 1765.47,-420 1825.47,-420 1885.47,-420 1945.47,-420 2005.47,-420 4370,-420 4430,-420 4490,-420 4550,-420 1765.47,-281 1825.47,-281 1885.47,-281 1945.47,-281 4370,-281 4430,-281 4490,-281 2005.47,-279 4550,-279
pads on no net: J1.0 J1.A1_1 J1.A1_2 J1.A1_4 J1.A1_5 J1.A1_19 J1.A1_20 J1.A1_22 J1.A1_23 J1.A1_25 J1.A1_26 J1.A2_3 J1.A2_5 J1.A2_6 J1.A2_7 J1.A2_8 J1.A2_12 J1.A2_13 J1.A2_14 J1.A2_15 J1.A2_16 J1.A2_17 J1.A2_18 J1.A2_19 J1.A2_20 J1.A2_21 J1.A2_22 J1.A2_23 J1.A2_24 J1.A2_25 J1.A2_26 J1.A2_27 J1.A2_28 J1.A2_29 J1.A2_30 J1.A2_31 J1.A2_32 J1.A2_33 J1.A2_34 J1.A2_35 J1.A2_36 J1.A2_37 J1.A2_38 J1.A2_39 J1.A2_40 J1.B1_1 J1.B1_2 J1.B1_4 J1.B1_5 J1.B1_19 J1.B1_20 J1.B1_22 J1.B1_23 J1.B2_8 J1.B2_9 J1.B2_10 J1.B2_11 J1.B2_12 J1.B2_13 J1.B2_14 J1.B2_15 J1.B2_16 J1.B2_17 J1.B2_18 J1.B2_19 J1.B2_20 J1.B2_21 J1.B2_22 J1.B2_23 J1.B2_24 J1.B2_25 J1.B2_27 J1.ZH-C1 J1.ZH-C2 J2.0 J2.A1_1 J2.A1_2 J2.A1_4 J2.A1_5 J2.A1_19 J2.A1_20 J2.A1_22 J2.A1_23 J2.A1_25 J2.A1_26 J2.A2_3 J2.A2_5 J2.A2_6 J2.A2_7 J2.A2_8 J2.A2_12 J2.A2_13 J2.A2_14 J2.A2_15 J2.A2_16 J2.A2_17 J2.A2_18 J2.A2_19 J2.A2_20 J2.A2_21 J2.A2_22 J2.A2_23 J2.A2_24 J2.A2_25 J2.A2_26 J2.A2_27 J2.A2_28 J2.A2_29 J2.A2_30 J2.A2_31 J2.A2_32 J2.A2_33 J2.A2_34 J2.A2_35 J2.A2_36 J2.A2_37 J2.A2_38 J2.A2_39 J2.A2_40 J2.B1_1 J2.B1_2 J2.B1_4 J2.B1_5 J2.B1_19 J2.B1_20 J2.B1_22 J2.B1_23 J2.B2_8 J2.B2_9 J2.B2_10 J2.B2_11 J2.B2_12 J2.B2_13 J2.B2_14 J2.B2_15 J2.B2_16 J2.B2_17 J2.B2_18 J2.B2_19 J2.B2_20 J2.B2_21 J2.B2_22 J2.B2_23 J2.B2_24 J2.B2_25 J2.B2_27 J2.ZH-C1 J2.ZH-C2 J3.6 J6.6 J7. J7.P0_A4 J7.P0_A5 J7.P0_A6 J7.P0_A7 J7.P0_B7 J7.P0_B8 J7.P0_C8 J7.P0_D1 J7.P0_D2 J7.P0_D3 J7.P0_D7 J7.P1_A1 J7.P1_A3 J7.P1_A5 J7.P1_A7 J7.P1_A9 J7.P1_A11 J7.P1_B2 J7.P1_B4 J7.P1_B6 J7.P1_B8 J7.P1_B9 J7.P1_B11 J7.P1_D1 J7.P1_D3 J7.P1_D5 J7.P1_D7 J7.P1_D9 J7.P1_D11 J7.P1_E2 J7.P1_E4 J7.P1_E6 J7.P1_E8 J7.P1_E9 J7.P1_E10 J7.P1_E11 J7.P1_E12 J7.P1_F10 J7.P1_F12 J7.P1_G1 J7.P1_G3 J7.P1_G5 J7.P1_G7 J7.P1_G9 J7.P1_G11 J7.P1_G13 J7.P1_G15 J7.P2_A5 J7.P2_A15 J7.P2_B5 J7.P2_B14 J7.P2_B15 J7.P2_B16 J7.P2_C14 J7.P2_C16 J7.P2_D5 J7.P2_D15 J7.P2_E5 J7.P2_E14 J7.P2_E15 J7.P2_E16 J7.P2_F14 J7.P2_F16 J7.P2_G1 J7.P2_G3 J7.P2_G5 J7.P2_G7 J7.P2_G9 J7.P2_G11 J7.P2_G13 J7.P2_G15

## Polygon pours and split planes (outlines as drawn)
GND on TOP "GND_L" (solid, remove dead copper, pour order 6): -140.56,-3718.5 -140.56,218.5 6158.65,218.5 6158.65,-3718.5
VCO_12V on TOP "NONET_L-01_P-001" (solid, remove dead copper, pour order 0): 4312,-233.5 4288,-257.5 4288,-489.5 4300,-501.5 4572,-501.5 4603,-470.5 4603,-255.5 4581,-233.5
GND on TOP "NONET_L-01_P-001" (solid, remove dead copper, pour order 3): 4294.36,-521 4284.53,-530.84 4284.53,-836 4308.53,-860 4553.53,-860 4601.53,-812 4601.53,-572 4577.53,-548 4495.53,-548 4468.53,-521
GND on TOP "NONET_L-01_P-001" (solid, remove dead copper, pour order 2): 1749.84,-521 1740,-530.84 1740,-836 1764,-860 2009,-860 2057,-812 2057,-572 2033,-548 1951,-548 1924,-521
VCO_12V on TOP "NONET_L-01_P-001" (solid, remove dead copper, pour order 1): 1763.47,-234 1751.47,-246 1751.47,-502 2023.47,-502 2050.47,-475 2050.47,-347 2050.47,-252 2032.47,-234
GND on S03 "GND_L" (solid, remove dead copper, pour order 7): -140.56,-3718.5 -140.56,218.5 6158.65,218.5 6158.65,-3718.5
VCO_12V on S03 "NONET_L-01_P-001" (solid, remove dead copper, pour order 5): 5453,119 5780,-208 6079,-208 6132,-261 6132,-532 6118,-546 1771,-546 1743,-518 1743,99 1763,119
GND on BOTTOM "GND_L" (solid, remove dead copper, pour order 9): -140.56,-3718.5 -140.56,218.5 6158.65,218.5 6158.65,-3718.5
GND on S04 "GND_L" (solid, remove dead copper, pour order 8): -140.56,-3718.5 -140.56,218.5 6158.65,218.5 6158.65,-3718.5
GND on GND05 (split plane): 6138.56,-3698.41 -120.46,-3698.41 -120.46,198.41 6138.56,198.41
GND on GND02 (split plane): 6138.56,-3698.41 -120.46,-3698.41 -120.46,198.41 6138.56,198.41

## Keep-outs
Keep-Out Layer:
  the board outline again, w10

## Other copper
TOP:
  rectangle net GND: -101.18,-3698.82 6119.29,-3561.02
  rectangle net GND: -101.18,61.02 6119.29,198.82
  pour cut-out: 1079,-176 1338,-176 1385,-223 1385,-450 1322,-513 1067,-513 1026,-472 1026,-229 1080,-175
  pour cut-out: 3637,-178 3870,-178 3926,-234 3926,-505 3851,-580 3669,-580 3580,-491 3580,-219 3622,-177 3638,-177
  pour cut-out: 3616,-516 3561,-571 3561,-1964 3490,-2035 3646,-2191 6169,-2191 6284,-2076 6284,-1795 6193,-1704 4598,-1704 3956,-1062 3956,-543 3929,-516 3867,-516
  pour cut-out: 1049,-512 1034,-527 1034,-1689 1749,-2404 6093,-2404 6279,-2218 6279,-2024 2410,-2024 1402,-1016 1402,-555 1359,-512
BOTTOM:
  rectangle net GND: -101.18,61.02 6119.29,198.82
  rectangle net GND: -101.18,-3698.82 6119.29,-3561.02
  pour cut-out: 3582,-96 3673,-5 4939,-5 5138,-204 5138,-1525 5287,-1674 6185,-1674 6254,-1743 6254,-2004 6227,-2031 4779,-2031 4486,-1738 4486,-599 4418,-531 3624,-531 3582,-489
  pour cut-out: 2534,-8 2731,-205 2731,-1511 3217,-1997 6193,-1997 6227,-2031 6227,-2266 6180.93,-2312.07 2620.07,-2312.07 1989,-1681 1989,-612 1927,-550 1093,-550 1027,-484 1027,-22.2 1041.2,-8

## Silkscreen, mask and mechanical layers (free items; w line width, h text height)
Top Overlay:
  lines w5: -140.56,-1750 -140.56,218.5
Top Solder:
  rectangle: -101.18,-3698.82 6119.29,-3561.02
  rectangle: -101.18,61.02 6119.29,198.82
Bottom Solder:
  rectangle: -101.18,-3698.82 6119.29,-3561.02
  rectangle: -101.18,61.02 6119.29,198.82
Mechanical 1:
  the board outline again, w10

## Text inside footprints (layer, text, board x,y; h text height)
J1: Top Overlay "A1" at 803.74,-3173.27 h393.7 r180; Top Overlay "B1" at 804.11,-2893.24 h393.7 r180; Top Overlay "A40" at 1891.45,-563.77 h393.7 r180; Top Overlay "B40" at 1896.19,-294.83 h393.7 r180; Top Overlay "B1" at 804.11,-294.81 h393.7 r180; Top Overlay "A1" at 803.74,-563.03 h393.7 r180; Top Overlay "B40" at 1896.19,-2893.24 h393.7 r180; Top Overlay "A40" at 1891.45,-3162.19 h393.7 r180
J2: Top Overlay "A1" at 3348.27,-3173.27 h393.7 r180; Top Overlay "B1" at 3348.64,-2893.24 h393.7 r180; Top Overlay "A40" at 4435.97,-563.77 h393.7 r180; Top Overlay "B40" at 4440.71,-294.83 h393.7 r180; Top Overlay "B1" at 3348.63,-294.81 h393.7 r180; Top Overlay "A1" at 3348.27,-563.03 h393.7 r180; Top Overlay "B40" at 4440.71,-2893.24 h393.7 r180; Top Overlay "A40" at 4435.97,-3162.19 h393.7 r180
J7: Top Overlay "6" at 5640.94,-2436.35 h39.37 r90; Top Overlay "8" at 5640.94,-2578.08 h39.37 r90; Top Overlay "4" at 5640.94,-2294.61 h39.37 r90; Top Overlay "2" at 5640.94,-2152.88 h39.37 r90; Top Overlay "10" at 5640.94,-2736.21 h39.37 r90; Top Overlay "12" at 5640.94,-2877.94 h39.37 r90; Top Overlay "16" at 5640.94,-3161.41 h39.37 r90; Top Overlay "14" at 5640.94,-3019.67 h39.37 r90; Top Overlay "6" at 5640.94,-1302.49 h39.37 r90; Top Overlay "8" at 5640.94,-1444.22 h39.37 r90; Top Overlay "4" at 5640.94,-1160.76 h39.37 r90; Top Overlay "2" at 5640.94,-1019.02 h39.37 r90; Top Overlay "10" at 5640.94,-1602.35 h39.37 r90; Top Overlay "12" at 5640.94,-1744.08 h39.37 r90; Top Overlay "16" at 5640.94,-2027.55 h39.37 r90; Top Overlay "14" at 5640.94,-1885.82 h39.37 r90; Top Overlay "2" at 5640.94,-452.09 h39.37 r90; Top Overlay "4" at 5640.94,-593.83 h39.37 r90; Top Overlay "8" at 5640.94,-877.29 h39.37 r90; Top Overlay "6" at 5640.94,-735.56 h39.37 r90; Top Overlay "B" at 6066.14,-239.5 h39.37 r90; Top Overlay "A" at 6119.29,-239.5 h39.37 r90; Top Overlay "G" at 5800.39,-239.5 h39.37 r90; Top Overlay "C" at 6012.99,-239.5 h39.37 r90; Top Overlay "D" at 5959.84,-239.5 h39.37 r90; Top Overlay "E" at 5906.69,-239.5 h39.37 r90; Top Overlay "F" at 5853.54,-239.5 h39.37 r90; Top Overlay "B" at 6066.14,-3215.87 h39.37 r90; Top Overlay "A" at 6119.29,-3215.87 h39.37 r90; Top Overlay "G" at 5800.39,-3215.87 h39.37 r90; Top Overlay "C" at 6012.99,-3215.87 h39.37 r90; Top Overlay "D" at 5959.84,-3215.87 h39.37 r90; Top Overlay "E" at 5906.69,-3215.87 h39.37 r90; Top Overlay "F" at 5853.54,-3215.87 h39.37 r90; Bottom Overlay "16" at 5640.94,-3102.37 h39.37 r90; Bottom Overlay "14" at 5640.94,-2960.64 h39.37 r90; Bottom Overlay "12" at 5640.94,-2818.91 h39.37 r90; Bottom Overlay "10" at 5640.94,-2677.17 h39.37 r90; Bottom Overlay "6" at 5640.94,-2410.11 h39.37 r90; Bottom Overlay "8" at 5640.94,-2551.84 h39.37 r90; Bottom Overlay "4" at 5640.94,-2268.38 h39.37 r90; Bottom Overlay "2" at 5640.94,-2126.64 h39.37 r90; Bottom Overlay "16" at 5640.94,-1968.51 h39.37 r90; Bottom Overlay "14" at 5640.94,-1826.78 h39.37 r90; Bottom Overlay "12" at 5640.94,-1685.05 h39.37 r90; Bottom Overlay "10" at 5640.94,-1543.32 h39.37 r90; Bottom Overlay "6" at 5640.94,-1276.25 h39.37 r90; Bottom Overlay "8" at 5640.94,-1417.98 h39.37 r90; Bottom Overlay "4" at 5640.94,-1134.52 h39.37 r90; Bottom Overlay "2" at 5640.94,-992.79 h39.37 r90; Bottom Overlay "B" at 6066.14,-213.26 h39.37 r90; Bottom Overlay "A" at 6119.29,-213.26 h39.37 r90; Bottom Overlay "G" at 5800.39,-213.26 h39.37 r90; Bottom Overlay "C" at 6012.99,-213.26 h39.37 r90; Bottom Overlay "D" at 5959.84,-213.26 h39.37 r90; Bottom Overlay "E" at 5906.69,-213.26 h39.37 r90; Bottom Overlay "F" at 5853.54,-213.26 h39.37 r90; Bottom Overlay "2" at 5640.94,-425.86 h39.37 r90; Bottom Overlay "4" at 5640.94,-567.59 h39.37 r90; Bottom Overlay "8" at 5640.94,-851.05 h39.37 r90; Bottom Overlay "6" at 5640.94,-709.32 h39.37 r90; Bottom Overlay "B" at 6066.14,-3189.64 h39.37 r90; Bottom Overlay "A" at 6119.29,-3189.64 h39.37 r90; Bottom Overlay "G" at 5800.39,-3189.64 h39.37 r90; Bottom Overlay "C" at 6012.99,-3189.64 h39.37 r90; Bottom Overlay "D" at 5959.84,-3189.64 h39.37 r90; Bottom Overlay "E" at 5906.69,-3189.64 h39.37 r90; Bottom Overlay "F" at 5853.54,-3189.64 h39.37 r90